# EAGLE board USB-HID-micro_new (EAGLE 5.11)

Size 103.17 x 32.05 mm. Coordinates in mm from the lower left corner, seen from the top.
Outline: 0,0 103.17,0 103.17,32.05 0,32.05 0,0
Copper layers (1*16): Top 0.035mm / dielectric 1.5mm / Bottom 0.035mm
Design rules "default *": minimum track width 12mil, minimum drill 32mil, track to track 12mil, track to pad 12mil, pad to pad 12mil, via to via 12mil, smd to smd 12mil, copper to edge 25mil, drill to drill 10mil, minimum pad ring 10mil, minimum via ring 8mil, stop-mask expansion 4mil, vias tented up to drill 0mil, thermal gap 10mil
Holes 2 mm at 3.2,5.7 3.2,27.2 100.2,5.7 100.2,27.2
tRestrict: area 15.4,15.6 to 16.7,18.1; area 14.4,5.7 to 15.7,8.3; area 17,5.7 to 18.2,8.3; area 11.9,5.7 to 13.2,8.3; area 15.4,15.6 to 16.7,18.1; area 37.8,13.5 to 40.3,14.8; area 37.8,8.4 to 40.3,9.7; area 66.2,25.7 to 67.5,27; area 66.2,23.2 to 67.5,24.4; area 63.7,23.2 to 64.9,24.4; area 63.7,25.7 to 64.9,27; area 61.1,25.7 to 62.4,27; 49 more areas
vRestrict: area 36.5,5.9 to 41.6,17.3; area 14,14.6 to 18.4,19.1; area 87,5.4 to 96.2,26.7; area 60,22.2 to 68.6,27.9

## Footprints (pad centres in the part's own frame; a part is rotated, then mirrored left to right if it is on the bottom)
C2.5-2 = drill 0.813 pad 1.6 octagon: 1 -1.27,0; 2 1.27,0
E1,8-4 = drill 0.711 pad 1.168 round: + -0.889,0 | drill 0.711 pad 1.168 octagon: - 0.889,0
DO35Z10 = drill 0.813 long: A 5.08,0; C -5.08,0
DIL28-3 = drill 0.813 long: 1 -16.51,-3.81; 2 -13.97,-3.81; 3 -11.43,-3.81; 4 -8.89,-3.81; 5 -6.35,-3.81; 6 -3.81,-3.81; 7 -1.27,-3.81; 8 1.27,-3.81; 9 3.81,-3.81; 10 6.35,-3.81; 11 8.89,-3.81; 12 11.43,-3.81; 13 13.97,-3.81; 14 16.51,-3.81; 15 16.51,3.81; 16 13.97,3.81; 17 11.43,3.81; 18 8.89,3.81; 19 6.35,3.81; 20 3.81,3.81; 21 1.27,3.81; 22 -1.27,3.81; 23 -3.81,3.81; 24 -6.35,3.81; 25 -8.89,3.81; 26 -11.43,3.81; 27 -13.97,3.81; 28 -16.51,3.81
AVR-ISP-6 = drill 1.016 square: 1 -2.54,-1.27 | drill 1.016 octagon: 2 -2.54,1.27; 3 0,-1.27; 4 0,1.27; 5 2.54,-1.27; 6 2.54,1.27
DUOLED-A-5MM = drill 0.813 long: A 0,0; CR 2.54,0; CX -2.54,0
QS = drill 0.61 long: 1 -2.54,0; 2 2.54,0
0204/7 = drill 0.813 octagon: 1 -3.81,0; 2 3.81,0
057-010-1 = drill 1 octagon: 1 -5.08,-1.27; 2 -5.08,1.27; 3 -2.54,-1.27; 4 -2.54,1.27; 5 0,-1.27; 6 0,1.27; 7 2.54,-1.27; 8 2.54,1.27; 9 5.08,-1.27; 10 5.08,1.27
32005-601 = drill 0.7 pad 1.016 round: 1 2.825,1.6; 2 1.625,0.8; 3 2.825,0; 4 1.625,-0.8; 5 2.825,-1.6 | drill 1 pad 1.422 long: M1 -2.225,3.65; M2 -2.225,-3.65

## Placement (x,y rotation side)
C1  27pF  [C2.5-2]  31.28,8.55 0 top
C2  27pF  [C2.5-2]  31.28,14.27 0 top
C4  4,7 microF  [E1,8-4]  16.03,16.84 270 top
D1  3,6V 0,5W  [DO35Z10]  15.07,24.78 180 top
D2  3,6V 0,5W  [DO35Z10]  15.07,27.32 180 top
IC1  MEGA8-P  [DIL28-3]  64.92,12.08 180 top
JP1  AVR-ISP-6VERT  [AVR-ISP-6]  64.3,25.07 180 top
LD1  [DUOLED-A-5MM]  15.07,7 0 top
Q1  16 Mhz  [QS]  39.03,11.58 90 top
R1  68 Ohm  [0204/7]  37.62,24.78 270 top
R2  68 Ohm  [0204/7]  33.81,24.78 270 top
R3  1,5k Ohm  [0204/7]  30,24.78 270 top
R4  10k Ohm  [0204/7]  26.19,24.78 270 top
X1  057-010-1  [057-010-1]  91.59,16.21 270 top
X3  MINI-USB_SHIELD5P2-32005-601  [32005-601]  6.08,16.97 0 top

## Library data of the parts
C1 C2 = capacitor-wima
C4 = rcl
D1 D2 = diode
IC1 = atmel; OC_FARNELL: unknown; OC_NEWARK: unknown
JP1 = avr-7
LD1 = led
Q1 = special
R1-R4 = resistor
X1 = con-panduit; OC_FARNELL: unknown; OC_NEWARK: unknown
X3 = con-cypressindustries; OC_FARNELL: unknown; OC_NEWARK: unknown

## Nets
AVCC: IC1.20